# EAGLE board rtc (EAGLE 5.02)
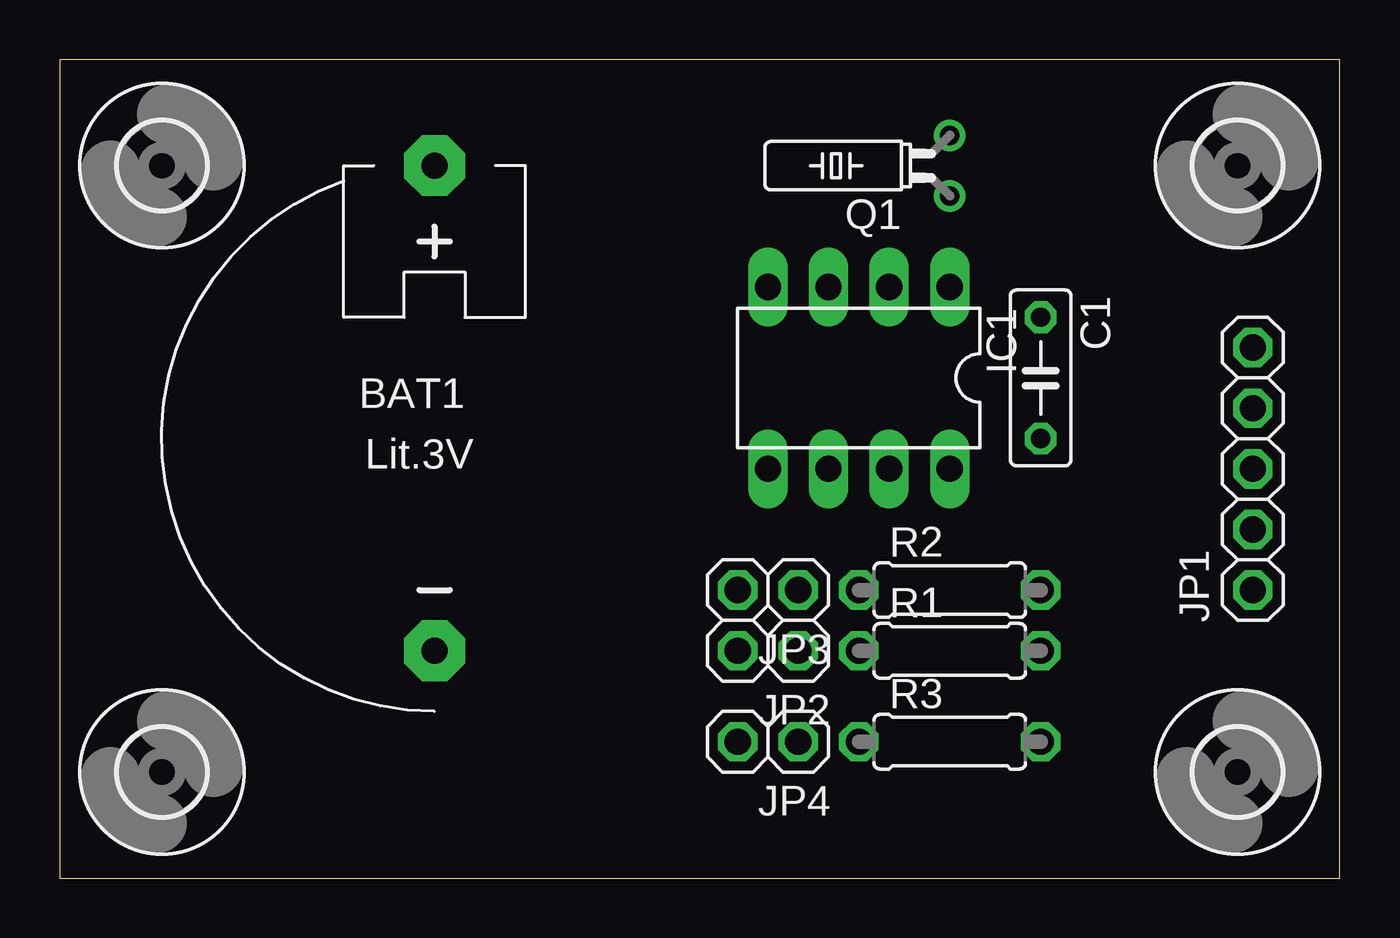
[diagram p0: board, top side]
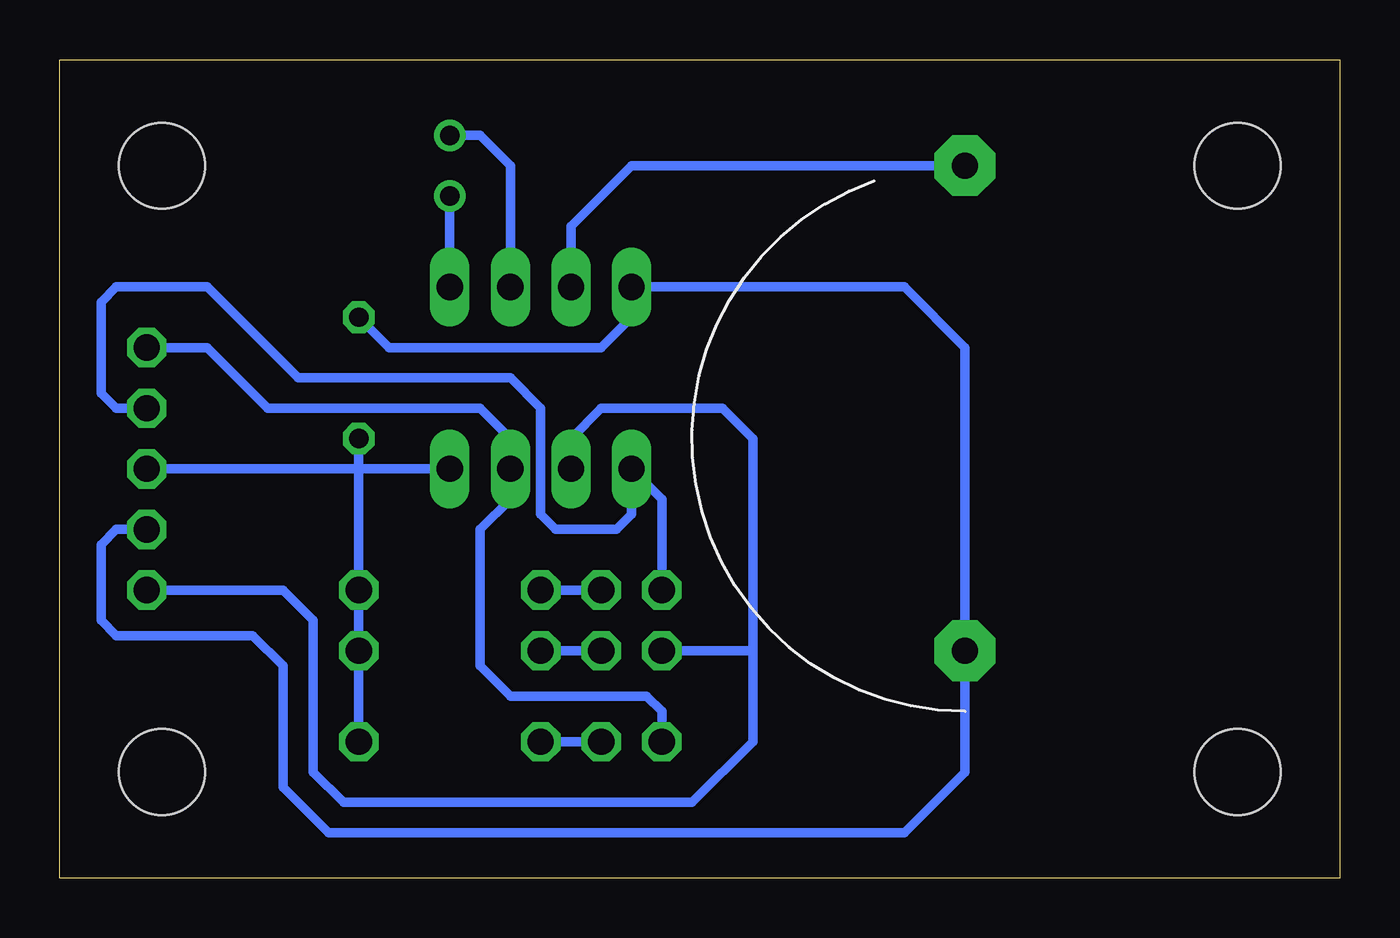
[diagram p1: board, bottom side, seen from below]

Size 53.65 x 34.28 mm. Coordinates in mm from the lower left corner, seen from the top.
Outline: 0,0 53.65,0 53.65,34.28 0,34.28 0,0
Copper layers (1*16): Top 0.035mm / dielectric 1.5mm / Bottom 0.035mm
Design rules "default": minimum track width 10mil, minimum drill 24mil, track to track 8mil, track to pad 8mil, pad to pad 8mil, via to via 8mil, smd to smd 8mil, copper to edge 40mil, drill to drill 8mil, minimum pad ring 10mil, minimum via ring 8mil, stop-mask expansion 4mil, vias tented up to drill 0mil, thermal gap 10mil

## Footprints (pad centres in the part's own frame; a part is rotated, then mirrored left to right if it is on the bottom)
CR2032H = drill 1.1 pad 2.54 octagon: + 0,11.43; - 0,-8.89
C050-025X075 = drill 0.813 octagon: 1 -2.54,0; 2 2.54,0
DIL08 = drill 1.1 long: 1 -3.81,-3.81; 2 -1.27,-3.81; 3 1.27,-3.81; 4 3.81,-3.81; 5 3.81,3.81; 6 1.27,3.81; 7 -1.27,3.81; 8 -3.81,3.81
1X05 = drill 1.1 octagon: 1 -5.08,0; 2 -2.54,0; 3 0,0; 4 2.54,0; 5 5.08,0
1X02 = drill 1.1 octagon: 1 -1.27,0; 2 1.27,0
TC26H = drill 0.813 round: 1 -1.27,0; 2 1.27,0
0207/7 = drill 1.1 octagon: 1 -3.81,0; 2 3.81,0
3,6 = hole 3.6: 0,0

## Placement (x,y rotation side)
BAT1  CR2032  [CR2032H]  15.71,18.41 0 top
C1  [C050-025X075]  41.11,20.95 270 top
IC1  DS1307  [DIL08]  33.49,20.95 180 top
JP1  [1X05]  50,17.14 90 top
JP2  [1X02]  29.68,9.52 180 top
JP3  [1X02]  29.68,12.06 180 top
JP4  [1X02]  29.68,5.71 180 top
Q1  [TC26H]  37.3,29.84 90 top
R1  [0207/7]  37.3,9.52 0 top
R2  [0207/7]  37.3,12.06 0 top
R3  [0207/7]  37.3,5.71 0 top
U$1  [3,6]  4.28,4.44 0 top
U$2  [3,6]  4.28,29.84 0 top
U$3  [3,6]  49.37,29.84 0 top
U$4  [3,6]  49.37,4.44 0 top

## Library data of the parts
BAT1 C1 IC1 JP1-JP4 Q1 R1-R3 U$1-U$4 = RTC

## Nets
+5V: C1.2 IC1.8 JP1.3 R1.2 R2.2 R3.2
GND: BAT1.- C1.1 IC1.4 JP1.2
N$1: IC1.2 Q1.2
N$2: IC1.1 Q1.1
N$3: BAT1.+ IC1.3
N$4: JP2.1 R1.1
N$5: JP3.1 R2.1
N$6: JP4.1 R3.1
SCL: IC1.6 JP1.1 JP2.2
SDA: IC1.5 JP1.4 JP3.2
SQW/OUT: IC1.7 JP1.5 JP4.2

## Tracks (layer width: path | path; a pad name or v marks a point on that pad's centre or on a via)
+5V
  Bottom 0.406: 41.11,17.14 C1.2 | 41.11,17.14 R2.2 R1.2 R3.2 | 41.11,17.14 IC1.8 | 41.11,17.14 JP1.3
GND
  Bottom 0.406: C1.1 39.84,22.22 30.95,22.22 29.68,23.49 IC1.4 18.25,24.76 15.71,22.22 BAT1.- 15.71,4.44 18.25,1.9 42.38,1.9 44.29,3.81 44.29,8.88 45.55,10.15 51.27,10.15 51.91,10.79 51.91,13.96 51.27,14.6 JP1.2
N$1
  Bottom 0.406: IC1.2 34.76,29.84 36.03,31.11 Q1.2
N$2
  Bottom 0.406: IC1.1 Q1.1
N$3
  Bottom 0.406: BAT1.+ 29.68,29.84 32.22,27.3 IC1.3
N$4
  Bottom 0.406: JP2.1 R1.1
N$5
  Bottom 0.406: JP3.1 R2.1
N$6
  Bottom 0.406: JP4.1 R3.1
SCL
  Bottom 0.406: IC1.6 32.22,18.41 30.95,19.68 25.87,19.68 24.6,18.41 24.6,9.52 | 24.6,9.52 24.6,5.71 27.14,3.17 41.75,3.17 43.02,4.44 43.02,10.79 44.29,12.06 JP1.1 | 24.6,9.52 JP2.2
SDA
  Bottom 0.406: JP3.2 28.41,15.87 IC1.5 29.68,15.23 30.31,14.6 32.86,14.6 33.49,15.23 33.49,19.68 34.76,20.95 43.65,20.95 47.46,24.76 51.27,24.76 51.91,24.12 51.91,20.31 51.27,19.68 JP1.4
SQW/OUT
  Bottom 0.406: JP4.2 28.41,6.98 29.04,7.62 34.76,7.62 36.03,8.88 36.03,14.6 34.76,15.87 IC1.7 34.76,18.41 36.03,19.68 44.92,19.68 47.46,22.22 JP1.5